# EAGLE board WilamowskiAR (EAGLE 9.6.2)
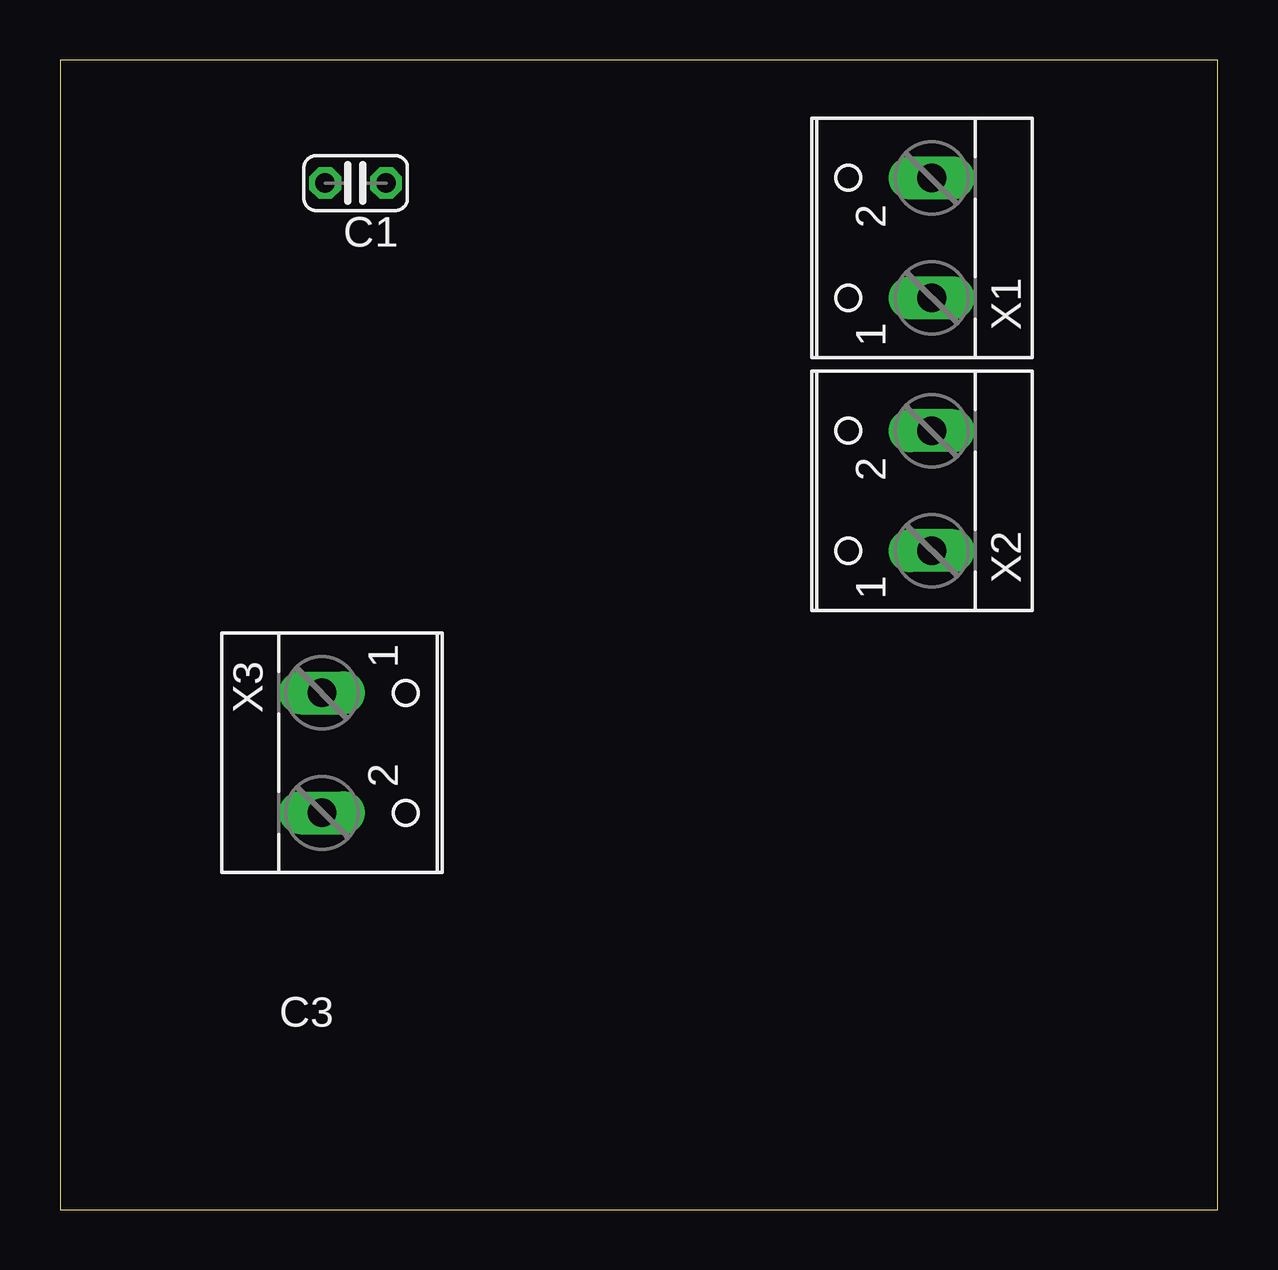
[diagram p0: board, top side]
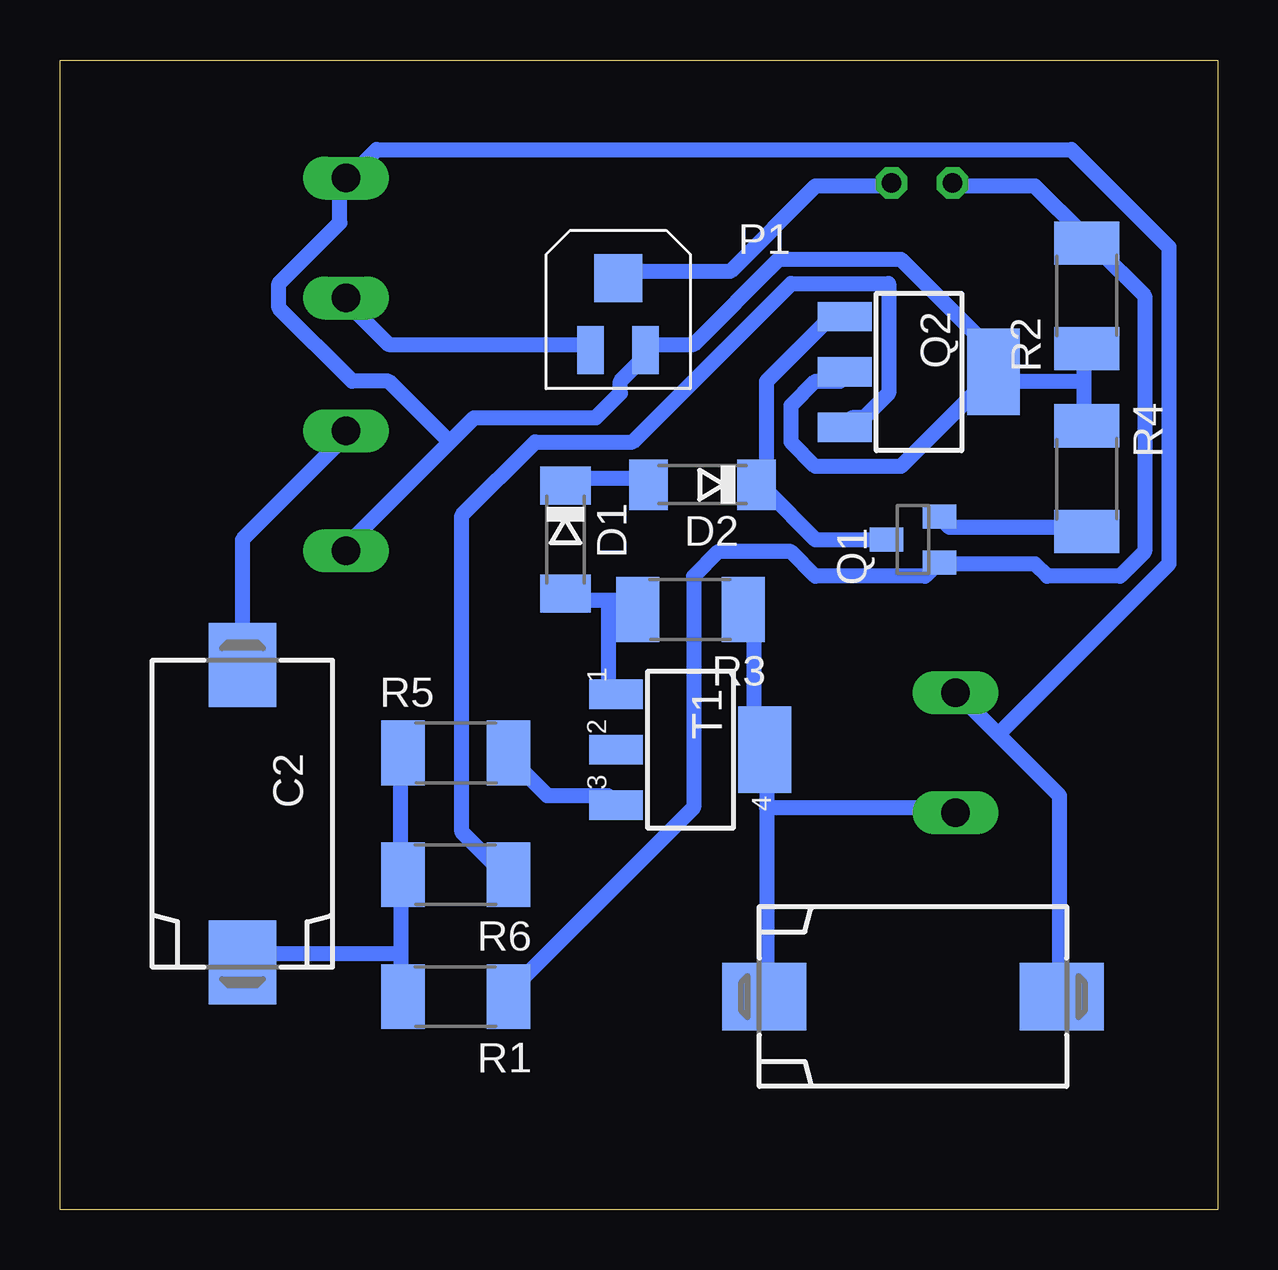
[diagram p1: board, bottom side, seen from below]

Size 48.24 x 47.93 mm. Coordinates in mm from the lower left corner, seen from the top.
Outline: 0,0 48.24,0 48.24,47.93 0,47.93 0,0
Copper layers (1*16): Top 0.035mm / dielectric 1.5mm / Bottom 0.035mm
Design rules "default *": minimum track width 25mil, minimum drill 0.35mm, track to track 15mil, track to pad 15mil, pad to pad 15mil, via to via 15mil, smd to smd 15mil, copper to edge 40mil, drill to drill 6mil, minimum pad ring 10mil, minimum via ring 8mil, stop-mask expansion 4mil, vias tented up to drill 0mil, thermal gap 10mil

## Footprints (pad centres in the part's own frame; a part is rotated, then mirrored left to right if it is on the bottom)
C025-024X044 = drill 0.813 octagon: 1 -1.27,0; 2 1.27,0
139CLL-3R = smd 3.5 x 2.8: + 6.2,0; - -6.2,0
SOD106-R = smd 1.6 x 2.1: A 2.25,0; C -2.25,0
1804(3314) = smd 1.1 x 2: H 4.85,7; L 7.15,7 | smd 2 x 2: S 6,10
SOT23 = smd 1 x 1.4: 1 -0.95,-1.1; 2 0.95,-1.1; 3 0,1.1
SOT223 = smd 1.219 x 2.235: 1 -2.311,-3.099; 2 0,-3.099; 3 2.311,-3.099 | smd 3.6 x 2.2: 4 0,3.099
R2010 = smd 1.8 x 2.7: 1 -2.2,0; 2 2.2,0
W237-102 = drill 1.194 long: 1 -2.5,-1.27; 2 2.5,-1.27

## Placement (x,y rotation side)
C1  10u  [C025-024X044]  12.32,42.8 180 top
C2  470u  [139CLL-3R]  40.64,16.51 270 bottom
C3  1000u  [139CLL-3R]  12.7,8.89 180 bottom
D1  DK  [SOD106-R]  27.18,27.94 270 bottom
D2  DK  [SOD106-R]  21.46,30.23 180 bottom
P1  [1804(3314)]  30.99,28.83 0 bottom
Q1  BC847CSMD  [SOT23]  12.7,27.94 90 bottom
Q2  FZT753SMD  [SOT223]  12.45,34.92 270 bottom
R1  5k6  [R2010]  31.75,8.89 180 bottom
R2  1k5  [R2010]  5.46,38.1 90 bottom
R3  470  [R2010]  21.97,25.02 180 bottom
R4  22  [R2010]  5.46,30.48 270 bottom
R5  3k3  [R2010]  31.75,19.05 0 bottom
R6  3k3  [R2010]  31.75,13.97 180 bottom
T1  BCP5616  [SOT223]  21.97,19.18 270 bottom
X1  [W237-102]  35.05,40.51 90 top
X2  [W237-102]  35.05,29.97 90 top
X3  [W237-102]  12.19,19.05 270 top

## Library data of the parts
C1-C3 R1-R6 = rcl
D1 D2 = diode
P1 = Wilamowski
Q1 = transistor-npn
Q2 = transistor-pnp
T1 = transistor-neu-to92
X1-X3 = con-wago-500; MPN: 237-102; OC_FARNELL: unknown; OC_NEWARK: 70K9898

## Nets
+15V: C3.+ R3.1 T1.4 X3.2
GND: C3.- P1.L Q2.2 Q2.4 R2.1 R4.1 X1.2 X2.1 X3.1
N$1: D2.C Q1.3 Q2.1
N$2: R5.2 T1.3
N$3: C2.+ R1.2 R5.1 R6.2
N$4: Q2.3 R6.1
N$5: D1.A R3.2 T1.1
N$6: C2.- X2.2
N$7: D1.C D2.A
N$8: C1.2 Q1.1 R1.1 R2.2
N$9: Q1.2 R4.2
POT-H: P1.H X1.1
POT-S: C1.1 P1.S

## Tracks (layer width: path | path; a pad name or v marks a point on that pad's centre or on a via)
+15V
  Bottom 0.635: R3.1 19.3,24.89 19.3,19.3 T1.4 18.8,18.8 18.8,16.76 | 18.8,16.76 18.8,9.14 C3.+ | 18.8,16.76 11.18,16.76 X3.2
GND
  Bottom 0.635: 9.14,19.81 10.67,21.34 X3.1 | 9.14,19.81 6.6,17.27 6.6,9.14 C3.- | 5.59,34.54 5.59,35.56 R2.1 | 5.59,34.54 5.59,33.02 R4.1 | Q2.2 15.75,34.54 16.76,34.54 17.78,33.53 17.78,32 16.76,30.99 13.21,30.99 9.65,34.54 Q2.4 | 5.59,34.54 9.14,34.54 Q2.4 | 32,32 36.07,27.94 X2.1 | 32,32 30.99,33.02 25.91,33.02 24.89,34.04 24.89,34.54 23.88,35.56 P1.L 23.37,36.07 21.84,36.07 18.29,39.62 13.21,39.62 9.65,36.07 9.65,35.05 Q2.4 | 32,32 34.54,34.54 36.07,34.54 39.12,37.59 39.12,38.61 36.58,41.15 36.58,42.67 X1.2 36.07,43.18 35.05,44.2 6.1,44.2 2.03,40.13 2.03,26.92 9.14,19.81
N$1
  Bottom 0.635: Q1.3 16.76,27.94 18.8,29.97 D2.C 18.8,30.48 18.8,34.54 16.26,37.08 15.75,37.08 Q2.1
N$2
  Bottom 0.635: T1.3 25.4,17.27 27.94,17.27 29.46,18.8 R5.2
N$3
  Bottom 0.635: 34.04,10.67 34.04,13.72 R6.2 34.04,14.22 34.04,18.8 R5.1 | 34.04,10.67 34.04,9.14 R1.2 | 34.04,10.67 40.64,10.67 C2.+
N$4
  Bottom 0.635: Q2.3 15.24,33.02 14.73,33.02 13.72,34.04 13.72,38.61 17.78,38.61 24.38,32 28.45,32 31.5,28.96 31.5,15.75 29.97,14.22 R6.1
N$5
  Bottom 0.635: 25.4,25.4 24.38,25.4 R3.2 | 25.4,25.4 26.92,25.4 D1.A | 25.4,25.4 25.4,21.84 T1.1
N$6
  Bottom 0.635: C2.- 40.64,27.94 36.58,32 X2.2
N$7
  Bottom 0.635: D1.C 26.92,30.48 23.88,30.48 D2.A
N$8
  Bottom 0.635: C1.2 10.67,42.67 7.62,42.67 5.59,40.64 R2.2 5.08,40.13 3.05,38.1 3.05,27.43 4.06,26.42 7.11,26.42 7.62,26.92 11.18,26.92 Q1.1 11.68,26.92 12.19,26.42 16.76,26.42 17.78,27.43 20.83,27.43 21.84,26.42 21.84,16.76 29.46,9.14 R1.1
N$9
  Bottom 0.635: Q1.2 11.18,28.45 5.59,28.45 R4.2
POT-H
  Bottom 0.635: P1.H 26.42,36.07 34.54,36.07 36.07,37.59 X1.1
POT-S
  Bottom 0.635: P1.S 24.89,39.12 20.32,39.12 16.76,42.67 13.72,42.67 C1.1